# Altium PCB version2.PcbDoc
Units mm, origin at the board's own origin, x right, y up, seen from the top; angles counter-clockwise.
Board outline 48.01 x 78.74 mm, 2 copper layers (Top Layer, Bottom Layer); 26 components, 23 nets, 104 pads, 9 vias.
Unrouted connection lines stored in the file: 1.
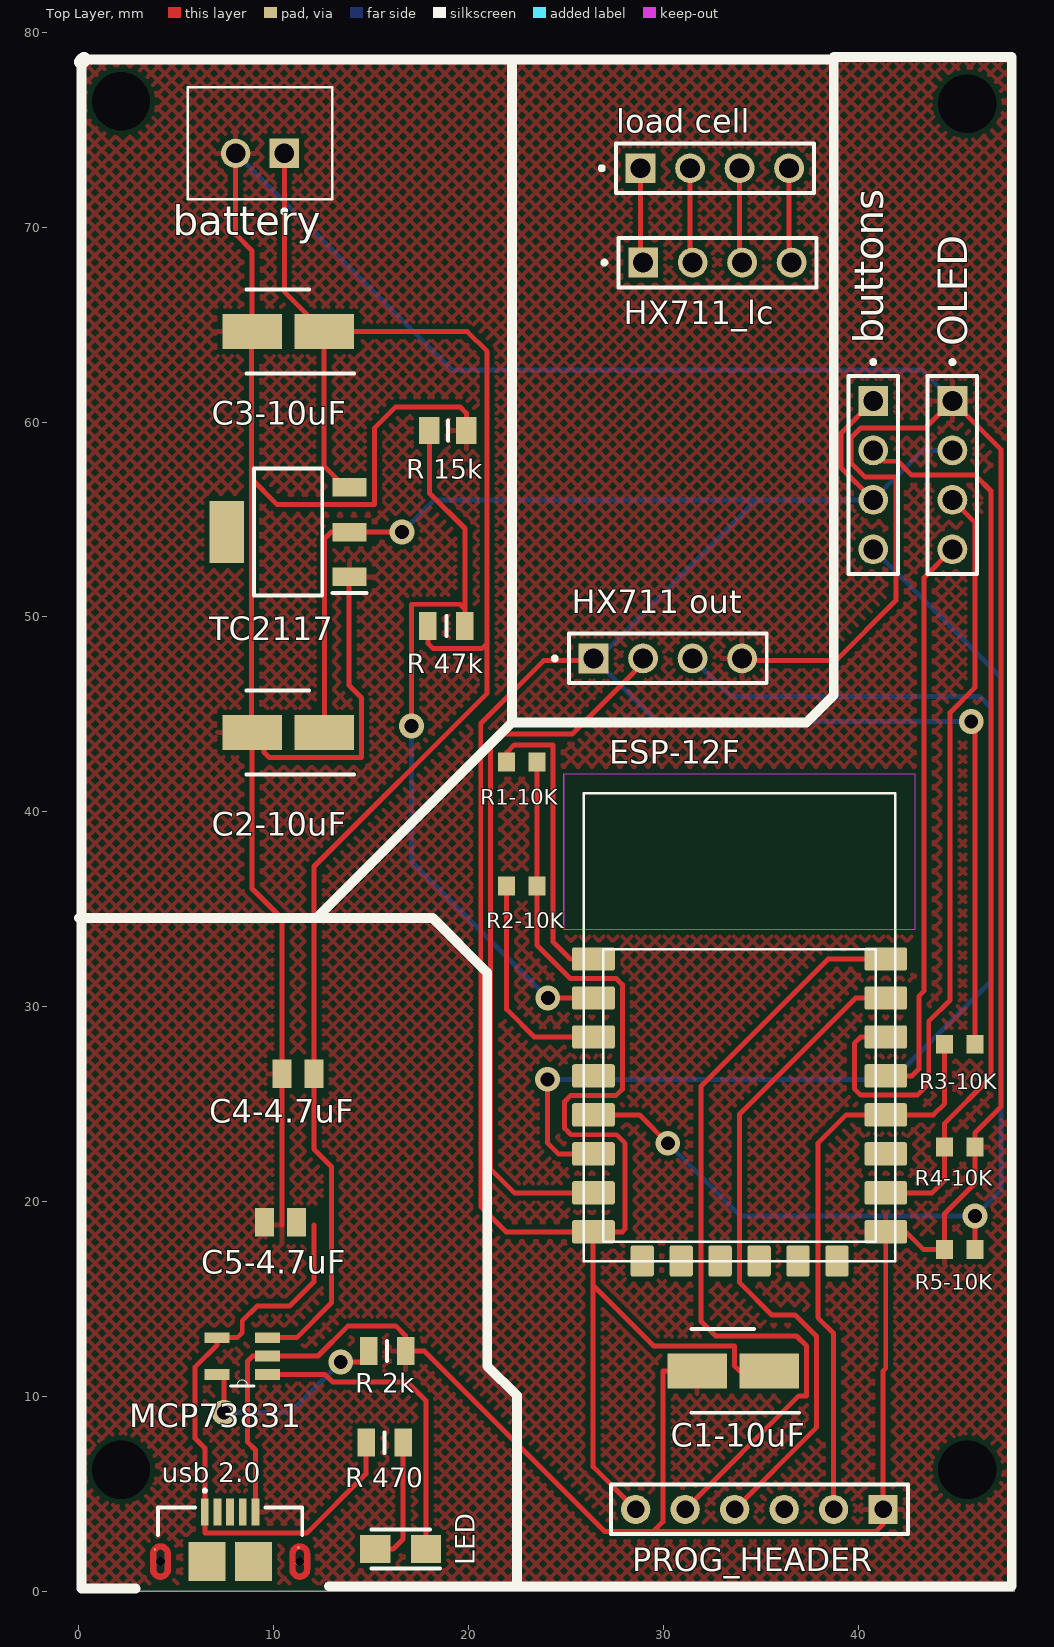
[diagram p0: Top Layer view]
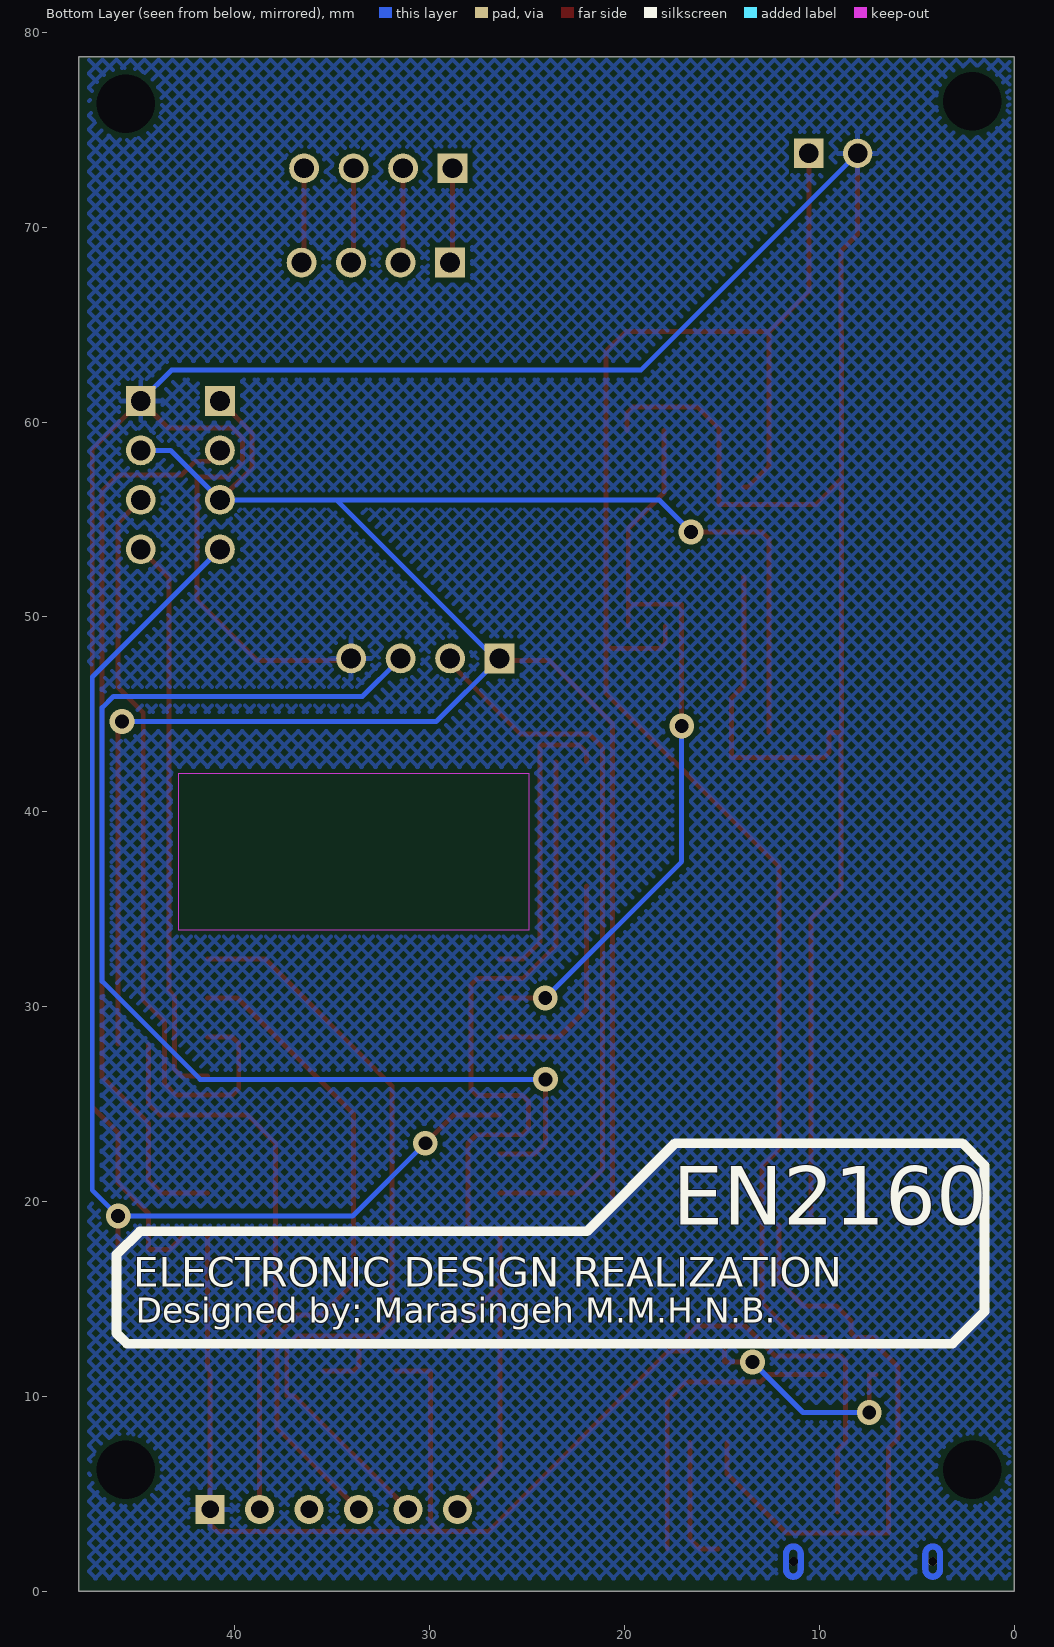
[diagram p1: Bottom Layer view, seen from below]
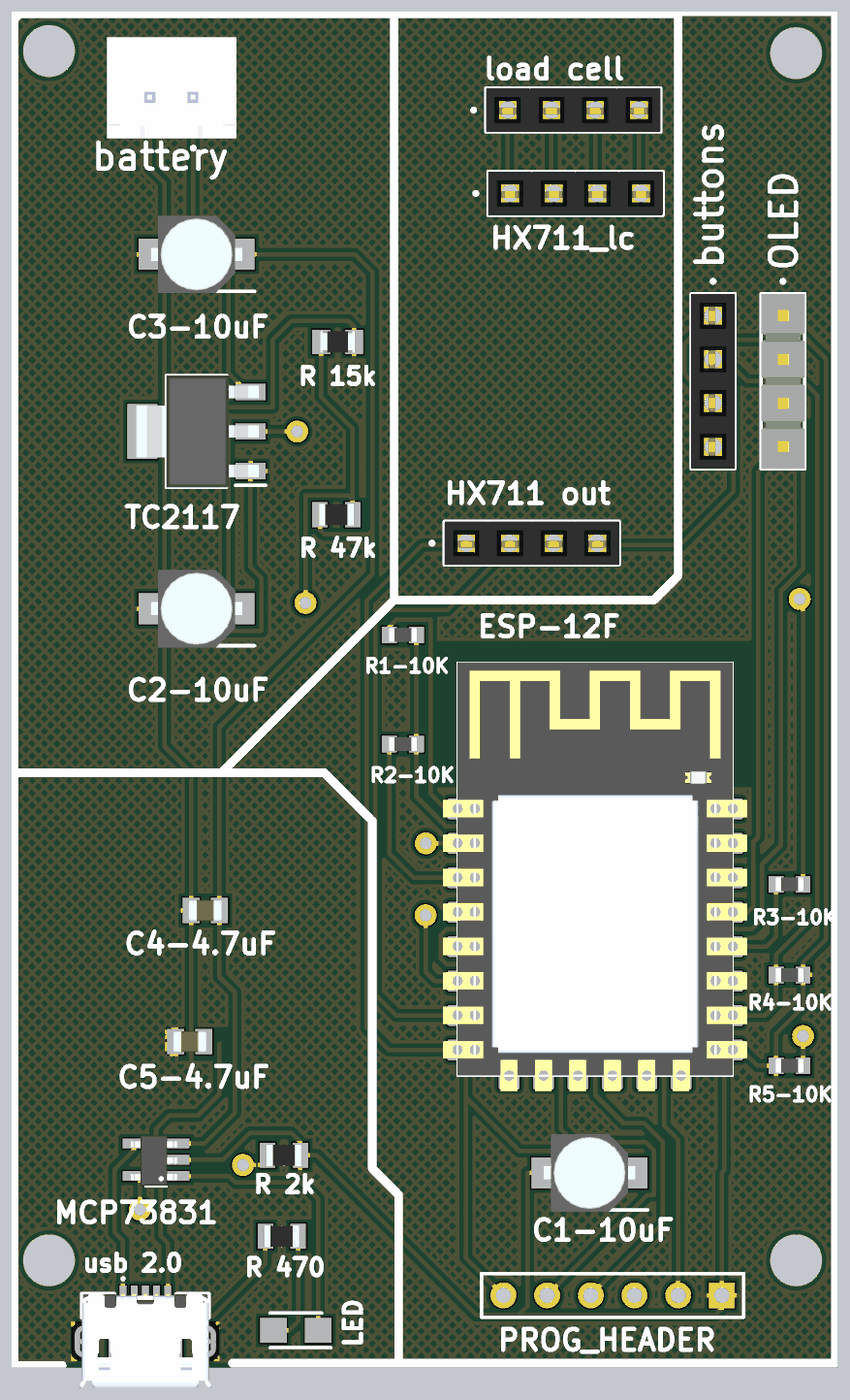
[diagram p2: 3D render of the assembled board from above, using the file's embedded part models]

## Layer stack, top to bottom
Top Solder: solder mask 0.0102, Solder Resist, Dk 3.5
Top Layer: signal copper 0.0356
Dielectric 1: dielectric 0.32, FR-4, Dk 4.8
Bottom Layer: signal copper 0.0356
Bottom Solder: solder mask 0.0102, Solder Resist, Dk 3.5

## Board outline
0,0 48.006,0 48.006,78.74 0,78.74

## Design rules (kind name [scope] priority, off if disabled: settings)
Clearance [All] p1: gap=0.254 ignorepadtopadclearanceinfootprint=FALSE except(0: Arc-Hole Track-Hole SMDPad-Hole THPad-Hole Via-Hole Fill-Hole Poly-Hole Region-Hole Text-Hole)
PolygonConnect [All] p1: connectstyle=Relief reliefconductorwidth=0.254 reliefentries=4 polygonreliefangle="90 Angle" airgapwidth=0.254
RoutingVias [All] p1: holewidth=0.711 width=1.27 viastyle="Through Hole" minholewidth=0.711 minwidth=1.27 maxholewidth=0.711 maxwidth=1.27
SolderMaskExpansion [All] p1: expansion=0.102 istentingtop=FALSE
Width [All] p1: maxlimit=0.254 minlimit=0.254 preferedwidth=0.254
30 further rules are at their usual default settings.

## Classes and differential pairs
component class "initial circuit": battery buttons C1-10uF C2-10uF C3-10uF C4-4.7uF C5-4.7uF ESP-12F LED "load cell" MCP73831 OLED PROG_HEADER R1-10K R2-10K R3-10K R4-10K R5-10K "R 2k" "R 15k" "R 47k" "R 470" TC2117 "usb 2.0"

## Components (designator, comment, footprint, x,y, rotation, side; value= is the part's Value field where it differs from the comment)
battery "B2B-XH-A(LF)(SN)" JST_B2B-XH-A(LF)(SN) 9.291,73.787 r0 top (schematic designator J?)
buttons "MTSW-104-XX-X-S-XXX" SAMTEC_MTSW-104-XX-X-S-XXX 40.767,57.277 r270 top (schematic designator J2)
C1-10uF "865080340001" CAPAE430X550N 33.583,11.303 r180 top
C2-10uF "865080340001" CAPAE430X550N 10.737,44.069 r180 top
C3-10uF "865080340001" CAPAE430X550N 10.737,64.643 r180 top
C4-4.7uF "885012107013" CAPC2012X145N 11.245,26.543 r0 top
C5-4.7uF "885012107013" CAPC2012X145N 10.345,18.923 r180 top
ESP-12F "ESP-12F" ESP-12F 33.909,27.94 r0 top (schematic designator IC1)
"HX711 out" "MTSW-104-XX-X-S-XXX" SAMTEC_MTSW-104-XX-X-S-XXX 30.225,47.868 r0 top (schematic designator J3)
HX711_lc "MTSW-104-XX-X-S-XXX" SAMTEC_MTSW-104-XX-X-S-XXX 32.77,68.185 r0 top (schematic designator J4)
LED "CLM3C-AKW-CUAVB253" LEDM3020X140N 16.51,2.159 r180 top
"load cell" "MTSW-104-XX-X-S-XXX" SAMTEC_MTSW-104-XX-X-S-XXX 32.639,73.025 r0 top (schematic designator J5)
MCP73831 "MCP73831T-5ACI/OT" SOT95P280X145-5N 8.382,12.065 r180 top
OLED "MTSW-104-XX-X-S-XXX" SAMTEC_MTSW-104-XX-X-S-XXX 44.831,57.277 r270 top (schematic designator J1)
PROG_HEADER "Header 6" HDR1X6 41.275,4.191 r180 top
R1-10K "CRG0603F10K/10" RESC1608X55N 22.733,42.545 r180 top
R2-10K "CRG0603F10K/10" RESC1608X55N 22.733,36.195 r180 top
R3-10K "CRG0603F10K/10" RESC1608X55N 45.212,28.067 r0 top
R4-10K "CRG0603F10K/10" RESC1608X55N 45.212,22.796 r180 top
R5-10K "CRG0603F10K/10" RESC1608X55N 45.212,17.526 r0 top
"R 2k" "CR0805-JW-202ELF" RESC2012X60N 15.814,12.319 r180 top
"R 15k" "ERJ-6GEYJ153V" RESC2012X70N 18.937,59.563 r180 top
"R 47k" "CR0805-JW-473ELF" RESC2012X60N 18.862,49.53 r180 top
"R 470" "CRCW0805470RFKEAC" RESC2012X60N 15.687,7.62 r0 top
TC2117 "TC2117-3.3VDBTR" SOT230P700X180-4N 10.737,54.356 r180 top (schematic designator B1)
"usb 2.0" "USB3090-XX-X_REVE" GCT_USB3090-XX-X_REVE 7.762,1.514 r0 top

## Footprints (in the part's own frame and the unit in brackets; to place one, negate y for a bottom-side part, rotate by r counter-clockwise, add the part's x,y. Pads: shape width x height; smd on the part's side, far side on the other; paste and mask are expansions set on the pad)
CAPAE430X550N [mm]
  rect 3.05x1.8 smd: 1(-1.85,0) 2(1.85,0)
  silkscreen extent -3.38,-2.15 2.15,2.15, body extent -10,-3.38 10,3.38, height 5.8
CAPC2012X145N [mm]
  rect 0.99x1.47 smd: 1(-0.82,0) 2(0.82,0)
  body extent -10,-3.38 10,3.38, height 5.8
ESP-12F [mm]
  rrect20% 2.2x1.2 smd: 1(-7.5,4.5) 2(-7.5,2.5) 3(-7.5,0.5) 4(-7.5,-1.5) 5(-7.5,-3.5) 6(-7.5,-5.5) 7(-7.5,-7.5) 8(-7.5,-9.5) 9(7.5,-9.5) 10(7.5,-7.5) 11(7.5,-5.5) 12(7.5,-3.5) 13(7.5,-1.5) 14(7.5,0.5) 15(7.5,2.5) 16(7.5,4.5)
  rrect20% 1.2x1.6 smd: 17(-5,-11) 18(-3,-11) 19(-1,-11) 20(1,-11) 21(3,-11) 22(5,-11)
  Keep-Out Layer region: 9,6.005 -9.007,6.005 -9.007,14 9,14
  Keep-Out Layer region: 9,6.011 -9.016,6.011 -9.016,14 9,14
  silkscreen extent -8,-11 8,13, body extent -8.85,-11.88 8.85,13.02, height 3.1
GCT_USB3090-XX-X_REVE [mm]
  rect 0.4x1.4 smd: 1(-1.3,2.55) 2(-0.65,2.55) 3(0,2.55) 4(0.65,2.55) 5(1.3,2.55)
  rect 0.1x0.1 smd paste-1 mask+0: 6(-3.87,0.63) 7(3.51,0.72)
  rect 1.9x2 smd: 8(-1.2,0) 9(1.2,0)
  round 0.45 hole 0.45 unplated: ""(-3.575,0) ""(3.575,0)
  Top Layer region: 4.1,-0.4 4.099,-0.427 4.097,-0.455 4.094,-0.482 4.089,-0.509 4.082,-0.536 4.074,-0.562 4.065,-0.588 4.055,-0.614 4.043,-0.638 4.03,-0.663 4.015,-0.686 4,-0.709 3.983,-0.73 3.965,-0.751 3.946,-0.771 3.926,-0.79 3.905,-0.808 3.884,-0.825 3.861,-0.84 3.837,-0.855 3.813,-0.868 3.789,-0.88 3.763,-0.89 3.737,-0.899 3.711,-0.907 3.684,-0.914 3.657,-0.919 3.63,-0.922 3.602,-0.924 3.575,-0.925 3.548,-0.924 3.52,-0.922 3.493,-0.919 3.466,-0.914 3.439,-0.907 3.413,-0.899 3.387,-0.89 3.361,-0.88 3.337,-0.868 3.313,-0.855 3.289,-0.84 3.266,-0.825 3.245,-0.808 3.224,-0.79 3.204,-0.771 3.185,-0.751 3.167,-0.73 3.15,-0.709 3.135,-0.686 3.12,-0.662 3.107,-0.638 3.095,-0.614 3.085,-0.588 3.076,-0.562 3.068,-0.536 3.061,-0.509 3.056,-0.482 3.053,-0.455 3.051,-0.427 3.05,-0.4 3.05,0 3.35,0 3.35,-0.4 3.35,-0.412 3.351,-0.424 3.353,-0.435 3.355,-0.447 3.358,-0.458 3.361,-0.47 3.365,-0.481 3.369,-0.492 3.375,-0.502 3.38,-0.512 3.386,-0.523 3.393,-0.532 3.4,-0.542 3.408,-0.551 3.416,-0.559 3.424,-0.567 3.433,-0.575 3.443,-0.582 3.452,-0.589 3.463,-0.595 3.473,-0.6 3.483,-0.606 3.494,-0.61 3.505,-0.614 3.517,-0.617 3.528,-0.62 3.54,-0.622 3.551,-0.624 3.563,-0.625 3.587,-0.625 3.599,-0.624 3.61,-0.622 3.622,-0.62 3.633,-0.617 3.645,-0.614 3.656,-0.61 3.667,-0.606 3.677,-0.6 3.688,-0.595 3.698,-0.589 3.707,-0.582 3.717,-0.575 3.726,-0.567 3.734,-0.559 3.742,-0.551 3.75,-0.542 3.757,-0.532 3.764,-0.523 3.77,-0.513 3.775,-0.502 3.781,-0.492 3.785,-0.481 3.789,-0.47 3.792,-0.458 3.795,-0.447 3.797,-0.435 3.799,-0.424 3.8,-0.412 3.8,-0.4 3.8,0 4.1,0
  Top Layer region: 3.602,0.924 3.63,0.922 3.657,0.919 3.684,0.914 3.711,0.907 3.737,0.899 3.763,0.89 3.789,0.88 3.813,0.868 3.837,0.855 3.861,0.84 3.884,0.825 3.905,0.808 3.926,0.79 3.946,0.771 3.965,0.751 3.983,0.73 4,0.709 4.015,0.686 4.03,0.663 4.043,0.638 4.055,0.614 4.065,0.588 4.074,0.562 4.082,0.536 4.089,0.509 4.094,0.482 4.097,0.455 4.099,0.427 4.1,0.4 4.1,0 3.8,0 3.8,0.4 3.8,0.412 3.799,0.424 3.797,0.435 3.795,0.447 3.792,0.458 3.789,0.47 3.785,0.481 3.781,0.492 3.775,0.502 3.77,0.513 3.764,0.523 3.757,0.532 3.75,0.542 3.742,0.551 3.734,0.559 3.726,0.567 3.717,0.575 3.707,0.582 3.698,0.589 3.688,0.595 3.677,0.6 3.667,0.606 3.656,0.61 3.645,0.614 3.633,0.617 3.622,0.62 3.61,0.622 3.599,0.624 3.587,0.625 3.563,0.625 3.551,0.624 3.54,0.622 3.528,0.62 3.517,0.617 3.505,0.614 3.494,0.61 3.483,0.606 3.473,0.6 3.463,0.595 3.452,0.589 3.443,0.582 3.433,0.575 3.424,0.567 3.416,0.559 3.408,0.551 3.4,0.542 3.393,0.532 3.386,0.523 3.38,0.512 3.375,0.502 3.369,0.492 3.365,0.481 3.361,0.47 3.358,0.458 3.355,0.447 3.353,0.435 3.351,0.424 3.35,0.412 3.35,0.4 3.35,0 3.05,0 3.05,0.4 3.051,0.427 3.053,0.455 3.056,0.482 3.061,0.509 3.068,0.536 3.076,0.562 3.085,0.588 3.095,0.614 3.107,0.638 3.12,0.662 3.135,0.686 3.15,0.709 3.167,0.73 3.185,0.751 3.204,0.771 3.224,0.79 3.245,0.808 3.266,0.825 3.289,0.84 3.313,0.855 3.337,0.868 3.361,0.88 3.387,0.89 3.413,0.899 3.439,0.907 3.466,0.914 3.493,0.919 3.52,0.922 3.548,0.924 3.575,0.925
  Top Layer region: -3.05,-0.4 -3.051,-0.427 -3.053,-0.455 -3.056,-0.482 -3.061,-0.509 -3.068,-0.536 -3.076,-0.562 -3.085,-0.588 -3.095,-0.614 -3.107,-0.638 -3.12,-0.662 -3.135,-0.686 -3.15,-0.709 -3.167,-0.73 -3.185,-0.751 -3.204,-0.771 -3.224,-0.79 -3.245,-0.808 -3.266,-0.825 -3.289,-0.84 -3.313,-0.855 -3.337,-0.868 -3.361,-0.88 -3.387,-0.89 -3.413,-0.899 -3.439,-0.907 -3.466,-0.914 -3.493,-0.919 -3.52,-0.922 -3.548,-0.924 -3.575,-0.925 -3.602,-0.924 -3.63,-0.922 -3.657,-0.919 -3.684,-0.914 -3.711,-0.907 -3.737,-0.899 -3.763,-0.89 -3.789,-0.88 -3.813,-0.868 -3.837,-0.855 -3.861,-0.84 -3.884,-0.825 -3.905,-0.808 -3.926,-0.79 -3.946,-0.771 -3.965,-0.751 -3.983,-0.73 -4,-0.709 -4.015,-0.686 -4.03,-0.663 -4.043,-0.638 -4.055,-0.614 -4.065,-0.588 -4.074,-0.562 -4.082,-0.536 -4.089,-0.509 -4.094,-0.482 -4.097,-0.455 -4.099,-0.427 -4.1,-0.4 -4.1,0 -3.8,0 -3.8,-0.4 -3.8,-0.412 -3.799,-0.424 -3.797,-0.435 -3.795,-0.447 -3.792,-0.458 -3.789,-0.47 -3.785,-0.481 -3.781,-0.492 -3.775,-0.502 -3.77,-0.513 -3.764,-0.523 -3.757,-0.532 -3.75,-0.542 -3.742,-0.551 -3.734,-0.559 -3.726,-0.567 -3.717,-0.575 -3.707,-0.582 -3.698,-0.589 -3.688,-0.595 -3.677,-0.6 -3.667,-0.606 -3.656,-0.61 -3.645,-0.614 -3.633,-0.617 -3.622,-0.62 -3.61,-0.622 -3.599,-0.624 -3.587,-0.625 -3.563,-0.625 -3.551,-0.624 -3.54,-0.622 -3.528,-0.62 -3.517,-0.617 -3.505,-0.614 -3.494,-0.61 -3.483,-0.606 -3.473,-0.6 -3.463,-0.595 -3.452,-0.589 -3.443,-0.582 -3.433,-0.575 -3.424,-0.567 -3.416,-0.559 -3.408,-0.551 -3.4,-0.542 -3.393,-0.532 -3.386,-0.523 -3.38,-0.512 -3.375,-0.502 -3.369,-0.492 -3.365,-0.481 -3.361,-0.47 -3.358,-0.458 -3.355,-0.447 -3.353,-0.435 -3.351,-0.424 -3.35,-0.412 -3.35,-0.4 -3.35,0 -3.05,0
  Top Layer region: -3.548,0.924 -3.52,0.922 -3.493,0.919 -3.466,0.914 -3.439,0.907 -3.413,0.899 -3.387,0.89 -3.361,0.88 -3.337,0.868 -3.313,0.855 -3.289,0.84 -3.266,0.825 -3.245,0.808 -3.224,0.79 -3.204,0.771 -3.185,0.751 -3.167,0.73 -3.15,0.709 -3.135,0.686 -3.12,0.662 -3.107,0.638 -3.095,0.614 -3.085,0.588 -3.076,0.562 -3.068,0.536 -3.061,0.509 -3.056,0.482 -3.053,0.455 -3.051,0.427 -3.05,0.4 -3.05,0 -3.35,0 -3.35,0.4 -3.35,0.412 -3.351,0.424 -3.353,0.435 -3.355,0.447 -3.358,0.458 -3.361,0.47 -3.365,0.481 -3.369,0.492 -3.375,0.502 -3.38,0.512 -3.386,0.523 -3.393,0.532 -3.4,0.542 -3.408,0.551 -3.416,0.559 -3.424,0.567 -3.433,0.575 -3.443,0.582 -3.452,0.589 -3.463,0.595 -3.473,0.6 -3.483,0.606 -3.494,0.61 -3.505,0.614 -3.517,0.617 -3.528,0.62 -3.54,0.622 -3.551,0.624 -3.563,0.625 -3.587,0.625 -3.599,0.624 -3.61,0.622 -3.622,0.62 -3.633,0.617 -3.645,0.614 -3.656,0.61 -3.667,0.606 -3.677,0.6 -3.688,0.595 -3.698,0.589 -3.707,0.582 -3.717,0.575 -3.726,0.567 -3.734,0.559 -3.742,0.551 -3.75,0.542 -3.757,0.532 -3.764,0.523 -3.77,0.513 -3.775,0.502 -3.781,0.492 -3.785,0.481 -3.789,0.47 -3.792,0.458 -3.795,0.447 -3.797,0.435 -3.799,0.424 -3.8,0.412 -3.8,0.4 -3.8,0 -4.1,0 -4.1,0.4 -4.099,0.427 -4.097,0.455 -4.094,0.482 -4.089,0.509 -4.082,0.536 -4.074,0.562 -4.065,0.588 -4.055,0.614 -4.043,0.638 -4.03,0.663 -4.015,0.686 -4,0.709 -3.983,0.73 -3.965,0.751 -3.946,0.771 -3.926,0.79 -3.905,0.808 -3.884,0.825 -3.861,0.84 -3.837,0.855 -3.813,0.868 -3.789,0.88 -3.763,0.89 -3.737,0.899 -3.711,0.907 -3.684,0.914 -3.657,0.919 -3.63,0.922 -3.602,0.924 -3.575,0.925
  Bottom Layer region: 4.1,-0.4 4.099,-0.427 4.097,-0.455 4.094,-0.482 4.089,-0.509 4.082,-0.536 4.074,-0.562 4.065,-0.588 4.055,-0.614 4.043,-0.638 4.03,-0.663 4.015,-0.686 4,-0.709 3.983,-0.73 3.965,-0.751 3.946,-0.771 3.926,-0.79 3.905,-0.808 3.884,-0.825 3.861,-0.84 3.837,-0.855 3.813,-0.868 3.789,-0.88 3.763,-0.89 3.737,-0.899 3.711,-0.907 3.684,-0.914 3.657,-0.919 3.63,-0.922 3.602,-0.924 3.575,-0.925 3.548,-0.924 3.52,-0.922 3.493,-0.919 3.466,-0.914 3.439,-0.907 3.413,-0.899 3.387,-0.89 3.361,-0.88 3.337,-0.868 3.313,-0.855 3.289,-0.84 3.266,-0.825 3.245,-0.808 3.224,-0.79 3.204,-0.771 3.185,-0.751 3.167,-0.73 3.15,-0.709 3.135,-0.686 3.12,-0.662 3.107,-0.638 3.095,-0.614 3.085,-0.588 3.076,-0.562 3.068,-0.536 3.061,-0.509 3.056,-0.482 3.053,-0.455 3.051,-0.427 3.05,-0.4 3.05,0 3.35,0 3.35,-0.4 3.35,-0.412 3.351,-0.424 3.353,-0.435 3.355,-0.447 3.358,-0.458 3.361,-0.47 3.365,-0.481 3.369,-0.492 3.375,-0.502 3.38,-0.512 3.386,-0.523 3.393,-0.532 3.4,-0.542 3.408,-0.551 3.416,-0.559 3.424,-0.567 3.433,-0.575 3.443,-0.582 3.452,-0.589 3.463,-0.595 3.473,-0.6 3.483,-0.606 3.494,-0.61 3.505,-0.614 3.517,-0.617 3.528,-0.62 3.54,-0.622 3.551,-0.624 3.563,-0.625 3.587,-0.625 3.599,-0.624 3.61,-0.622 3.622,-0.62 3.633,-0.617 3.645,-0.614 3.656,-0.61 3.667,-0.606 3.677,-0.6 3.688,-0.595 3.698,-0.589 3.707,-0.582 3.717,-0.575 3.726,-0.567 3.734,-0.559 3.742,-0.551 3.75,-0.542 3.757,-0.532 3.764,-0.523 3.77,-0.513 3.775,-0.502 3.781,-0.492 3.785,-0.481 3.789,-0.47 3.792,-0.458 3.795,-0.447 3.797,-0.435 3.799,-0.424 3.8,-0.412 3.8,-0.4 3.8,0 4.1,0
  Bottom Layer region: 3.602,0.924 3.63,0.922 3.657,0.919 3.684,0.914 3.711,0.907 3.737,0.899 3.763,0.89 3.789,0.88 3.813,0.868 3.837,0.855 3.861,0.84 3.884,0.825 3.905,0.808 3.926,0.79 3.946,0.771 3.965,0.751 3.983,0.73 4,0.709 4.015,0.686 4.03,0.663 4.043,0.638 4.055,0.614 4.065,0.588 4.074,0.562 4.082,0.536 4.089,0.509 4.094,0.482 4.097,0.455 4.099,0.427 4.1,0.4 4.1,0 3.8,0 3.8,0.4 3.8,0.412 3.799,0.424 3.797,0.435 3.795,0.447 3.792,0.458 3.789,0.47 3.785,0.481 3.781,0.492 3.775,0.502 3.77,0.513 3.764,0.523 3.757,0.532 3.75,0.542 3.742,0.551 3.734,0.559 3.726,0.567 3.717,0.575 3.707,0.582 3.698,0.589 3.688,0.595 3.677,0.6 3.667,0.606 3.656,0.61 3.645,0.614 3.633,0.617 3.622,0.62 3.61,0.622 3.599,0.624 3.587,0.625 3.563,0.625 3.551,0.624 3.54,0.622 3.528,0.62 3.517,0.617 3.505,0.614 3.494,0.61 3.483,0.606 3.473,0.6 3.463,0.595 3.452,0.589 3.443,0.582 3.433,0.575 3.424,0.567 3.416,0.559 3.408,0.551 3.4,0.542 3.393,0.532 3.386,0.523 3.38,0.512 3.375,0.502 3.369,0.492 3.365,0.481 3.361,0.47 3.358,0.458 3.355,0.447 3.353,0.435 3.351,0.424 3.35,0.412 3.35,0.4 3.35,0 3.05,0 3.05,0.4 3.051,0.427 3.053,0.455 3.056,0.482 3.061,0.509 3.068,0.536 3.076,0.562 3.085,0.588 3.095,0.614 3.107,0.638 3.12,0.662 3.135,0.686 3.15,0.709 3.167,0.73 3.185,0.751 3.204,0.771 3.224,0.79 3.245,0.808 3.266,0.825 3.289,0.84 3.313,0.855 3.337,0.868 3.361,0.88 3.387,0.89 3.413,0.899 3.439,0.907 3.466,0.914 3.493,0.919 3.52,0.922 3.548,0.924 3.575,0.925
  Bottom Layer region: -3.05,-0.4 -3.051,-0.427 -3.053,-0.455 -3.056,-0.482 -3.061,-0.509 -3.068,-0.536 -3.076,-0.562 -3.085,-0.588 -3.095,-0.614 -3.107,-0.638 -3.12,-0.662 -3.135,-0.686 -3.15,-0.709 -3.167,-0.73 -3.185,-0.751 -3.204,-0.771 -3.224,-0.79 -3.245,-0.808 -3.266,-0.825 -3.289,-0.84 -3.313,-0.855 -3.337,-0.868 -3.361,-0.88 -3.387,-0.89 -3.413,-0.899 -3.439,-0.907 -3.466,-0.914 -3.493,-0.919 -3.52,-0.922 -3.548,-0.924 -3.575,-0.925 -3.602,-0.924 -3.63,-0.922 -3.657,-0.919 -3.684,-0.914 -3.711,-0.907 -3.737,-0.899 -3.763,-0.89 -3.789,-0.88 -3.813,-0.868 -3.837,-0.855 -3.861,-0.84 -3.884,-0.825 -3.905,-0.808 -3.926,-0.79 -3.946,-0.771 -3.965,-0.751 -3.983,-0.73 -4,-0.709 -4.015,-0.686 -4.03,-0.663 -4.043,-0.638 -4.055,-0.614 -4.065,-0.588 -4.074,-0.562 -4.082,-0.536 -4.089,-0.509 -4.094,-0.482 -4.097,-0.455 -4.099,-0.427 -4.1,-0.4 -4.1,0 -3.8,0 -3.8,-0.4 -3.8,-0.412 -3.799,-0.424 -3.797,-0.435 -3.795,-0.447 -3.792,-0.458 -3.789,-0.47 -3.785,-0.481 -3.781,-0.492 -3.775,-0.502 -3.77,-0.513 -3.764,-0.523 -3.757,-0.532 -3.75,-0.542 -3.742,-0.551 -3.734,-0.559 -3.726,-0.567 -3.717,-0.575 -3.707,-0.582 -3.698,-0.589 -3.688,-0.595 -3.677,-0.6 -3.667,-0.606 -3.656,-0.61 -3.645,-0.614 -3.633,-0.617 -3.622,-0.62 -3.61,-0.622 -3.599,-0.624 -3.587,-0.625 -3.563,-0.625 -3.551,-0.624 -3.54,-0.622 -3.528,-0.62 -3.517,-0.617 -3.505,-0.614 -3.494,-0.61 -3.483,-0.606 -3.473,-0.6 -3.463,-0.595 -3.452,-0.589 -3.443,-0.582 -3.433,-0.575 -3.424,-0.567 -3.416,-0.559 -3.408,-0.551 -3.4,-0.542 -3.393,-0.532 -3.386,-0.523 -3.38,-0.512 -3.375,-0.502 -3.369,-0.492 -3.365,-0.481 -3.361,-0.47 -3.358,-0.458 -3.355,-0.447 -3.353,-0.435 -3.351,-0.424 -3.35,-0.412 -3.35,-0.4 -3.35,0 -3.05,0
  Bottom Layer region: -3.548,0.924 -3.52,0.922 -3.493,0.919 -3.466,0.914 -3.439,0.907 -3.413,0.899 -3.387,0.89 -3.361,0.88 -3.337,0.868 -3.313,0.855 -3.289,0.84 -3.266,0.825 -3.245,0.808 -3.224,0.79 -3.204,0.771 -3.185,0.751 -3.167,0.73 -3.15,0.709 -3.135,0.686 -3.12,0.662 -3.107,0.638 -3.095,0.614 -3.085,0.588 -3.076,0.562 -3.068,0.536 -3.061,0.509 -3.056,0.482 -3.053,0.455 -3.051,0.427 -3.05,0.4 -3.05,0 -3.35,0 -3.35,0.4 -3.35,0.412 -3.351,0.424 -3.353,0.435 -3.355,0.447 -3.358,0.458 -3.361,0.47 -3.365,0.481 -3.369,0.492 -3.375,0.502 -3.38,0.512 -3.386,0.523 -3.393,0.532 -3.4,0.542 -3.408,0.551 -3.416,0.559 -3.424,0.567 -3.433,0.575 -3.443,0.582 -3.452,0.589 -3.463,0.595 -3.473,0.6 -3.483,0.606 -3.494,0.61 -3.505,0.614 -3.517,0.617 -3.528,0.62 -3.54,0.622 -3.551,0.624 -3.563,0.625 -3.587,0.625 -3.599,0.624 -3.61,0.622 -3.622,0.62 -3.633,0.617 -3.645,0.614 -3.656,0.61 -3.667,0.606 -3.677,0.6 -3.688,0.595 -3.698,0.589 -3.707,0.582 -3.717,0.575 -3.726,0.567 -3.734,0.559 -3.742,0.551 -3.75,0.542 -3.757,0.532 -3.764,0.523 -3.77,0.513 -3.775,0.502 -3.781,0.492 -3.785,0.481 -3.789,0.47 -3.792,0.458 -3.795,0.447 -3.797,0.435 -3.799,0.424 -3.8,0.412 -3.8,0.4 -3.8,0 -4.1,0 -4.1,0.4 -4.099,0.427 -4.097,0.455 -4.094,0.482 -4.089,0.509 -4.082,0.536 -4.074,0.562 -4.065,0.588 -4.055,0.614 -4.043,0.638 -4.03,0.663 -4.015,0.686 -4,0.709 -3.983,0.73 -3.965,0.751 -3.946,0.771 -3.926,0.79 -3.905,0.808 -3.884,0.825 -3.861,0.84 -3.837,0.855 -3.813,0.868 -3.789,0.88 -3.763,0.89 -3.737,0.899 -3.711,0.907 -3.684,0.914 -3.657,0.919 -3.63,0.922 -3.602,0.924 -3.575,0.925
  silkscreen extent -3.7,1.37 3.7,3.69, body extent -3.9,-2.75 3.9,2.75, height 2.71
HDR1X6 [mm] "Connector; Header; 6 Position"
  rect 1.5x1.5 hole 0.9: 1(0,0)
  round 1.5 hole 0.9: 2(2.54,0) 3(5.08,0) 4(7.62,0) 5(10.16,0) 6(12.7,0)
  silkscreen extent -1.27,-1.27 13.97,1.27
JST_B2B-XH-A(LF)(SN) [mm]
  rect 1.508x1.508 / inner round 1.508 / far side rect 1.508x1.508 hole 1: 1(1.25,0)
  round 1.508 hole 1: 2(-1.25,0)
  silkscreen extent -3.7,-3.07 3.7,3.4, body extent -3.72,-2.37 3.68,3.38, height 7
LEDM3020X140N [mm]
  rect 1.55x1.45 smd: 1(-1.3,0) 2(1.3,0)
  silkscreen extent -2.02,-1 1.5,1, body extent -1.5,-0.49 1.5,0.51, height 2.01
RESC1608X55N [mm]
  rect 0.87x0.97 smd: 1(-0.78,0) 2(0.78,0)
  body extent -0.8,-0.4 0.8,0.4, height 0.55
RESC2012X60N [mm]
  rect 0.9x1.45 smd: 1(-0.95,0) 2(0.95,0)
  silkscreen extent 0,-0.53 0,0.53, body extent -1,-0.63 1,0.63, height 0.6
RESC2012X70N [mm]
  rect 1.05x1.4 smd: 1(-0.95,0) 2(0.95,0)
  silkscreen extent 0,-0.53 0,0.53, body extent -1,-0.63 1,0.63, height 0.6
SAMTEC_MTSW-104-XX-X-S-XXX [mm]
  rect 1.53x1.53 hole 1.02: 01(-3.81,0)
  round 1.53 hole 1.02: 02(-1.27,0) 03(1.27,0) 04(3.81,0)
  silkscreen extent -5.9,-1.27 5.08,1.27, body extent -5.08,-1.27 5.08,1.27, height 1.69
SOT95P280X145-5N [mil]
  rect 50x22 smd: 1(-51,37) 2(-51,0) 3(-51,-37) 4(51,-37) 5(51,37)
  silkscreen extent -24,49 24,61, body extent -48,-55 58,59, height 57
SOT230P700X180-4N [mm]
  rect 1.75x0.95 smd: 1(-3.15,2.3) 2(-3.15,0) 3(-3.15,-2.3)
  rect 1.75x3.2 smd: 4(3.15,0)
  silkscreen extent -4.03,-3.25 1.75,3.25, body extent -10,-3.38 10,3.38, height 5.8

## Part data
battery: "Connector Header Through Hole 2 position 0.098 (2.50mm)", Package=None, Availability="In Stock", MF="JST Sales", MP=B2B-XH-A(LF)(SN), Price=None, Purchase-URL=https://pricing.snapeda.com/search/part/B2B-XH-A(LF)(SN)/?ref=eda
buttons "HX711 out" HX711_lc "load cell" OLED: Package=None, Availability="No availability data", Check_prices=https://www.snapeda.com/parts/MTSW-104-12-F-S-850/Samtec/view-part/6593359/?ref=eda, MF=Samtec, MP=MTSW-104-12-F-S-850, Price=None, SnapEDA_Link=https://www.snapeda.com/parts/MTSW-104-12-F-S-850/Samtec/view-part/6593359/?ref=snap
C1-10uF C2-10uF C3-10uF: "Wurth Elektronik 10uF 16 V dc Aluminium Electrolytic Capacitor, WCAP-ASLI Series 2000h 4 (Dia.) x 5.35mm", Manufacturer_Name="Wurth Elektronik", Mouser Part Number=710-865080340001, Datasheet Link=https://componentsearchengine.com/Datasheets/1/865080340001.pdf, Geometry.Height=5.5mm, Manufacturer_Part_Number=865080340001, Mouser Price/Stock=https://www.mouser.co.uk/ProductDetail/Wurth-Elektronik/865080340001?qs=0KOYDY2FL2%252BaqRFD837lAw%3D%3D
C4-4.7uF C5-4.7uF: "Multilayer Ceramic Capacitor 4.7uF 0805", Manufacturer_Name="Wurth Elektronik", Mouser Part Number=710-885012107013, Datasheet Link=https://katalog.we-online.de/pbs/datasheet/885012107013.pdf, Geometry.Height=1.45mm, Manufacturer_Part_Number=885012107013, Mouser Price/Stock=https://www.mouser.co.uk/ProductDetail/Wurth-Elektronik/885012107013?qs=0KOYDY2FL29a055VqgRqNw%3D%3D
ESP-12F: "WiFi Module", Package=Package, Availability="Not in stock", Check_prices=https://www.snapeda.com/parts/ESP-12F/AI-Thinker/view-part/?ref=eda, MF=AI-Thinker, MP=ESP-12F, Price=None, SnapEDA_Link=https://www.snapeda.com/parts/ESP-12F/AI-Thinker/view-part/?ref=snap
LED: "Standard LEDs - SMD Amber LED Cree PLCC2 1 in 1 SMD LED CLM3C-RKW/AKW", Manufacturer_Name=Wolfspeed, Mouser Part Number=941-CLM3CAKWCUAVB253, Datasheet Link=https://www.mouser.co.uk/datasheet/2/90/CLM3CRKWAKW1156-274590.pdf, Geometry.Height=1.4mm, Manufacturer_Part_Number=CLM3C-AKW-CUAVB253, Mouser Price/Stock=https://www.mouser.co.uk/ProductDetail/Cree-LED/CLM3C-AKW-CUAVB253?qs=3AcK5DacLbqERPW6%2FzkoPg%3D%3D
MCP73831: "Charger IC Lithium Ion/Polymer SOT-23-5", Package="SOT-23-5 Microchip", Availability=Unavailable, MF=Microchip, MP=MCP73831T-5ACI/OT, Price=None, SnapEDA_Link=https://www.snapeda.com/parts/MCP73831T-5ACI/OT/Microchip/view-part/1037579/?ref=snap
PROG_HEADER: "Header, 6-Pin", LatestRevisionDate=17-Jul-2002, LatestRevisionNote="Re-released for DXP Platform.", Publisher="Altium Limited"
R1-10K R2-10K R3-10K R4-10K R5-10K: "Thick Film Resistors - SMD CRG0603 1% 10K 10K RL", Package=0603, Power_Rating=".1 W", Resistance=10K, Tolerance=1%, Voltage_Rating="50 V", Availability=Unavailable, EU_RoHS_Compliance="Compliant with Exemptions", MF="TE Connectivity", MP=CRG0603F10K/10, Price=None, SnapEDA_Link=https://www.snapeda.com/parts/CRG0603F10K/10/TE%20Connectivity%20Passive%20Product/view-part/979761/?ref=snap, TE_purchase_URL=https://www.te.com/usa-en/product-1622829-2.html?te_bu=Cor&te_type=disp&te_campaign=seda_glo_cor-seda-global-disp-prtnr-fy19-seda-model-bom-cta_sma-317_1&elqCampaignId=32493
"R 2k": "Resistor", Manufacturer_Name=Bourns, Mouser Part Number=652-CR0805JW-202ELF, Arrow Part Number=CR0805-JW-202ELF, Arrow Price/Stock=https://www.arrow.com/en/products/cr0805-jw-202elf/bourns, Datasheet Link=https://www.bourns.com/pdfs/chpreztr.pdf, Height=0.6mm, Manufacturer_Part_Number=CR0805-JW-202ELF, Mouser Price/Stock=https://www.mouser.co.uk/ProductDetail/Bourns/CR0805-JW-202ELF?qs=wL7NMIHXUPnyGz%2Fa3t%2FGQg%3D%3D
"R 15k": "Resistor", Manufacturer_Name=Panasonic, Mouser Part Number=667-ERJ-6GEYJ153V, Datasheet Link=https://datasheet.datasheetarchive.com/originals/distributors/DKDS40/DSANUWW0010935.pdf, Height=0.7mm, Manufacturer_Part_Number=ERJ-6GEYJ153V, Mouser Price/Stock=https://www.mouser.co.uk/ProductDetail/Panasonic/ERJ-6GEYJ153V?qs=gybxhQrZOyE8NVeFJR%2FEkg%3D%3D
"R 47k": "Resistor", Manufacturer_Name=Bourns, Mouser Part Number=652-CR0805JW-473ELF, Arrow Part Number=CR0805-JW-473ELF, Arrow Price/Stock=https://www.arrow.com/en/products/cr0805-jw-473elf/bourns?region=nac, Datasheet Link=https://www.bourns.com/pdfs/chpreztr.pdf, Height=0.6mm, Manufacturer_Part_Number=CR0805-JW-473ELF, Mouser Price/Stock=https://www.mouser.co.uk/ProductDetail/Bourns/CR0805-JW-473ELF?qs=%252BcBkmVQIZ2S5L%2FTv0l5Nkg%3D%3D
"R 470": "Resistor", Manufacturer_Name=Vishay, Mouser Part Number=71-CRCW0805470RFKEAC, Arrow Part Number=CRCW0805470RFKEAC, Arrow Price/Stock=https://www.arrow.com/en/products/crcw0805470rfkeac/vishay?region=nac, Datasheet Link=https://mouser.componentsearchengine.com/Datasheets/1/CRCW0805470RFKEAC.pdf, Height=0.6mm, Manufacturer_Part_Number=CRCW0805470RFKEAC, Mouser Price/Stock=https://www.mouser.co.uk/ProductDetail/Vishay-Dale/CRCW0805470RFKEAC?qs=E3Y5ESvWgWPsF5leBpDSrQ%3D%3D
TC2117: "Microchip TC2117-3.3VDBTR, LDO Voltage Regulator, 800mA, 3.3 V +/-0.5%, 2.7  6 Vin, 3-Pin SOT-223", Manufacturer_Name=Microchip, Mouser Part Number=579-TC2117-3.3VDBTR, Arrow Part Number=TC2117-3.3VDBTR, Arrow Price/Stock=https://www.arrow.com/en/products/tc2117-3.3vdbtr/microchip-technology?region=nac, Datasheet Link=https://componentsearchengine.com/Datasheets/2/TC2117-3.3VDBTR.pdf, Geometry.Height=1.8mm, Manufacturer_Part_Number=TC2117-3.3VDBTR, Mouser Price/Stock=https://www.mouser.co.uk/ProductDetail/Microchip-Technology/TC2117-3.3VDBTR?qs=AF%252BffTaPb30YsLOBvxArLw%3D%3D
"usb 2.0": "Micro USB Receptacle, Type AB, SMT, R/A, Bottom Mount, w/out Peg, w/outer shell stakes", Package=None, Availability=Unavailable, MP=USB3090-XX-X_REVE, Price=None

## Free pads (board coordinates)
  round 1.524 hole 3: 2(45.593,6.223) 3(45.593,76.327) 4(2.159,76.454) 5(2.159,6.223)

## Via types
v1: diameter 1.27, hole 0.711, Top Layer to Bottom Layer, 9 vias

## Nets (pads, with @x,y where several pads share a name; then routed paths per layer and width w, separated by ;. In a path a pad name is that pad's centre, name@x,y a point inside that pad or via, vN(x,y) a via of type N, cw(c..) or ccw(c..) an arc to the next point about the centre after c; other vN are vias at no path point)
A+: "load cell.01" HX711_lc.01 | length 4.7
  Top Layer w0.254: HX711_lc.01@28.829,68.326 28.829,73.025
A-: "load cell.02" HX711_lc.02 | length 4.7
  Top Layer w0.254: HX711_lc.02@31.369,68.326 31.369,73.025
BatLev: "R 15k.2" "R 47k.1" ESP-12F.2 | length 39.1
  Top Layer w0.254: v1(17.069,44.399) 17.069,50.648 19.558,50.648 19.812,50.394 ; 17.987,59.563 17.987,56.359 19.812,54.534 19.812,50.394 ; 19.812,49.53 19.812,50.394 ; v1(24.068,30.44) ESP-12F.2
  Bottom Layer w0.254: v1(17.069,44.399) 17.069,37.44 v1(24.068,30.44)
DT: "HX711 out.03" ESP-12F.6 | length 60.9
  Top Layer w0.254: v1(24.054,26.264) 24.054,22.987 24.601,22.44 ESP-12F.6
  Bottom Layer w0.254: v1(24.054,26.264) 41.783,26.264 46.812,31.293 46.812,45.339 46.228,45.923 33.452,45.923 31.623,47.752
E+: "load cell.04" HX711_lc.04 | length 4.7
  Top Layer w0.254: HX711_lc.04@36.449,68.326 36.449,73.025
E-: "load cell.03" HX711_lc.03 | length 4.7
  Top Layer w0.254: HX711_lc.03@33.909,68.326 33.909,73.025
FLASH: ESP-12F.12 PROG_HEADER.2 R3-10K.1 | length 29.5
  Top Layer w0.254: PROG_HEADER.2 38.735,13.22 37.922,14.033 37.922,22.987 39.375,24.44 ESP-12F.12 43.853,24.44 44.432,25.019 R3-10K.1
GND: "HX711 out.04" "R 2k.1" "R 15k.1" "usb 2.0.5" battery.2 C1-10uF.2 C2-10uF.2 C3-10uF.2 C4-4.7uF.1 C5-4.7uF.2 ESP-12F.9 MCP73831.2 OLED.01 PROG_HEADER.1 R4-10K.1 R5-10K.1 TC2117.1 | length 277.3
  Top Layer w0.254: battery.2 8.041,69.629 8.887,68.783 C3-10uF.2 8.865,64.643 8.865,57.074 ; 9.062,4.064 9.062,7.245 8.661,7.645 8.661,11.811 8.915,12.065 MCP73831.2 12.268,12.065 13.818,13.614 16.256,13.614 16.764,13.106 16.764,12.319 17.729,12.319 27,3.048 29.464,3.048 ; 10.425,18.796 C4-4.7uF.1 10.425,34.519 8.887,36.057 C2-10uF.2 ; TC2117.1 13.868,52.056 13.868,46.482 14.503,45.847 14.503,42.774 9.779,42.774 9.5,43.053 9.5,44.069 C2-10uF.2 ; 19.887,59.563 19.887,60.453 19.558,60.782 16.256,60.782 15.164,59.69 15.164,55.778 10.16,55.778 8.865,57.074 ; C1-10uF.2 29.972,11.303 29.972,3.556 29.464,3.048 ; 34.163,47.752 38.837,47.752 41.935,50.851 41.935,57.15 41.91,57.175 40.361,57.175 39.621,57.915 39.621,59.182 40.132,59.693 43.437,59.693 OLED.01 47.32,58.598 47.32,24.849 45.992,23.52 R4-10K.1 45.992,20.94 44.432,19.38 R5-10K.1 43.357,17.526 42.443,18.44 ESP-12F.9 41.409,11.437 41.275,11.303 PROG_HEADER.1 41.275,3.429 40.894,3.048 29.464,3.048 ; 8.865,57.074 8.865,44.069 C2-10uF.2
  Bottom Layer w0.254: battery.2 19.166,62.662 43.256,62.662 OLED.01
NetB1_3: "R 47k.2" battery.1 C3-10uF.1 C4-4.7uF.2 MCP73831.3 TC2117.3 | length 88.5
  Top Layer w0.254: MCP73831.3 11.176,13.005 12.954,14.783 12.954,21.793 12.065,22.682 C4-4.7uF.2 12.065,37.186 20.955,46.076 20.955,48.641 ; battery.1 10.541,66.689 C3-10uF.1 ; TC2117.3 13.67,56.656 12.587,57.739 C3-10uF.1 ; 17.912,49.53 17.912,48.641 18.166,48.387 20.701,48.387 20.955,48.641 ; C3-10uF.1 19.939,64.643 20.955,63.627 20.955,48.641
NetC5-4.7uF_1: "R 470.1" "usb 2.0.1" C5-4.7uF.1 MCP73831.4 | length 31.3
  Top Layer w0.254: 12.065,18.796 12.065,15.875 10.82,14.63 9.144,14.63 8.382,13.868 8.382,13.259 8.128,13.005 MCP73831.4 7.087,12.624 5.969,11.506 5.969,7.834 6.462,7.341 6.462,4.064 6.462,2.972 11.689,2.972 14.737,6.02 14.737,7.62
NetIC1_3: ESP-12F.3 R2-10K.2 | length 11.4
  Top Layer w0.254: R2-10K.2 21.953,29.855 23.368,28.44 ESP-12F.3
NetLED_1: LED.1 MCP73831.1 | length 16.3
  Top Layer w0.254: MCP73831.1 12.624,11.125 13.013,10.736 16.853,10.736 17.81,9.779 LED.1
NetLED_2: "R 470.2" LED.2 | length 6.6
  Top Layer w0.254: LED.2 16.129,2.159 16.637,2.667 16.637,7.62
NetMCP73831_5: "R 2k.2" MCP73831.5 | length 11.4
  Top Layer w0.254: MCP73831.5 7.442,11.125 v1(7.442,9.169) ; v1(13.437,11.76) 14.864,11.76 14.864,12.319
  Bottom Layer w0.254: v1(7.442,9.169) 10.846,9.169 v1(13.437,11.76)
RST: ESP-12F.1 R1-10K.2 | length 15.6
  Top Layer w0.254: R1-10K.2 21.953,43.035 22.352,43.434 24.333,43.434 24.333,33.325 25.218,32.44 ESP-12F.1
RX: ESP-12F.15 PROG_HEADER.4 | length 34.3
  Top Layer w0.254: PROG_HEADER.4 37.847,8.383 37.847,13.092 36.766,14.173 35.56,14.173 33.909,15.824 33.909,24.486 39.863,30.44 ESP-12F.15
SCK: "HX711 out.02" ESP-12F.7 | length 37.2
  Top Layer w0.254: ESP-12F.7 22.352,20.44 21.133,21.659 21.133,43.307 21.819,43.993 25.324,43.993 29.083,47.752
SCL: ESP-12F.14 OLED.03 | length 39.7
  Top Layer w0.254: ESP-12F.14 40.132,28.44 39.802,28.11 39.802,25.781 40.132,25.451 43.032,25.451 43.616,26.035 43.616,29.24 44.704,30.328 44.704,45.085 45.999,46.38 45.999,54.839 OLED.03
SDA: ESP-12F.13 OLED.04 | length 29.2
  Top Layer w0.254: ESP-12F.13 42.751,26.44 43.108,26.797 43.108,30.531 43.383,30.806 43.383,52.019 OLED.04
Tare: buttons.02 ESP-12F.10 R4-10K.2 | length 46.6
  Top Layer w0.254: buttons.02 41.326,57.988 42.037,57.988 42.748,57.277 45.999,57.277 46.812,56.464 46.812,26.383 44.432,24.003 R4-10K.2 44.432,21.082 43.79,20.44 ESP-12F.10
TX: ESP-12F.16 PROG_HEADER.5 | length 41.4
  Top Layer w0.254: PROG_HEADER.5 36.946,10.022 37.339,10.022 37.339,12.584 36.831,13.092 32.679,13.092 31.928,13.843 31.928,25.912 38.456,32.44 ESP-12F.16
Unit: buttons.04 ESP-12F.5 R5-10K.2 | length 60.9
  Top Layer w0.254: ESP-12F.5 28.773,24.44 v1(30.226,22.987) ; R5-10K.2 v1(45.992,19.246)
  Bottom Layer w0.254: v1(30.226,22.987) 33.967,19.246 v1(45.992,19.246) 47.32,20.574 47.32,46.914 buttons.04
VCC: "HX711 out.01" buttons.01 buttons.03 C1-10uF.1 C2-10uF.1 ESP-12F.8 OLED.02 PROG_HEADER.6 R1-10K.1 R2-10K.1 R3-10K.2 TC2117.2 | length 198.4
  Top Layer w0.254: C2-10uF.1 12.598,44.069 12.598,54 12.954,54.356 TC2117.2 v1(16.586,54.356) ; R1-10K.1 R2-10K.1 23.513,33.147 25.23,31.43 27.588,31.43 27.89,31.128 27.89,25.752 27.578,25.44 25.24,25.44 24.928,25.128 24.928,23.752 25.259,23.421 27.597,23.421 28.039,22.979 28.039,18.589 27.89,18.44 ESP-12F.8@26.391,18.44 ; 26.543,47.752 23.851,47.752 20.625,44.526 20.625,19.735 21.92,18.44 ESP-12F.8@26.391,18.44 ; PROG_HEADER.6 26.391,6.375 26.391,15.683 ; C1-10uF.1 33.893,11.303 33.639,11.557 33.639,12.584 29.489,12.584 26.391,15.683 ; buttons.03 39.113,57.661 39.113,59.433 buttons.01 ; v1(45.796,44.628) 45.992,44.432 R3-10K.2 ; 26.391,15.683 ESP-12F.8@26.391,18.44
  Bottom Layer w0.254: v1(16.586,54.356) 18.237,56.007 34.798,56.007 ; OLED.02 43.307,58.547 buttons.03 34.798,56.007 ; v1(45.796,44.628) 29.667,44.628 26.543,47.752 34.798,56.007
pads on no net: "usb 2.0.2" "usb 2.0.3" "usb 2.0.4" "usb 2.0.6" "usb 2.0.7" "usb 2.0.8" "usb 2.0.9" "usb 2.0." ESP-12F.4 ESP-12F.11 ESP-12F.17 ESP-12F.18 ESP-12F.19 ESP-12F.20 ESP-12F.21 ESP-12F.22 PROG_HEADER.3 TC2117.4

## Polygon pours and split planes (outlines as drawn)
GND on Top Layer "GND_L01_P000" (hatched 45Degree grid 0.508 track 0.203, pour order 0): 0.254,78.613 0.381,78.486 47.879,78.486 47.879,0.762 47.498,0.381 0.127,0.381 0.127,78.232
GND on Bottom Layer "GND_L02_P001" (hatched 45Degree grid 0.508 track 0.203, pour order 1): 0.254,78.486 0.381,78.613 47.498,78.613 47.498,0.889 47.752,0.635 0.254,0.635 0.254,78.105 0.127,78.232

## Silkscreen, mask and mechanical layers (free items; w line width, h text height)
Top Overlay:
  lines w0.5: 0,34.544 12.192,34.544 ; 0.127,34.29 0.127,0.127 2.921,0.127 ; 0.127,34.671 0.127,78.486 ; 0.254,78.613 22.225,78.613 ; 12.827,0.254 22.479,0.254 ; 38.608,78.613 22.225,78.613 ; 38.735,78.486 38.735,45.974 37.338,44.577 22.225,44.577 ; 38.735,78.74 47.879,78.74 47.879,0.254 22.479,0.254 ; 12.192,34.544 18.161,34.544 20.955,31.75 20.955,11.557 22.479,10.033 22.479,0.254 ; 12.192,34.544 22.225,44.577 ; 22.225,44.577 22.225,78.613
  lines w0.762: 0.127,78.486 0.254,78.613
Bottom Overlay:
  lines w0.5: 1.524,14.351 3.175,12.7 45.542,12.7 46.076,13.233 46.076,17.272 44.882,18.466 21.92,18.466 17.399,22.987 16.637,22.987 2.667,22.987 1.524,21.844 1.524,14.351
  text "EN2160" at 17.526,18.796 h3
  text "ELECTRONIC DESIGN REALIZATION" at 45.212,15.621 h1.52
  text "Designed by: Marasingeh M.M.H.N.B." at 45.085,13.768 h1.3

## Text inside footprints (layer, text, board x,y; h text height)
"usb 2.0": Mechanical 13 "PCB Edge" at 5.857,-1.026 h0.67